# Altium PCB QMKMouse.PcbDoc (part 1 of 2)
Units mm, origin at the board's own origin, x right, y up, seen from the top; angles counter-clockwise.
Board outline 104.61 x 65.75 mm, 4 copper layers (Top Layer, Plane 1, Plane 2, Bottom Layer), stack 0.78 mm thick; 110 components, 56 nets, 360 pads, 326 vias.
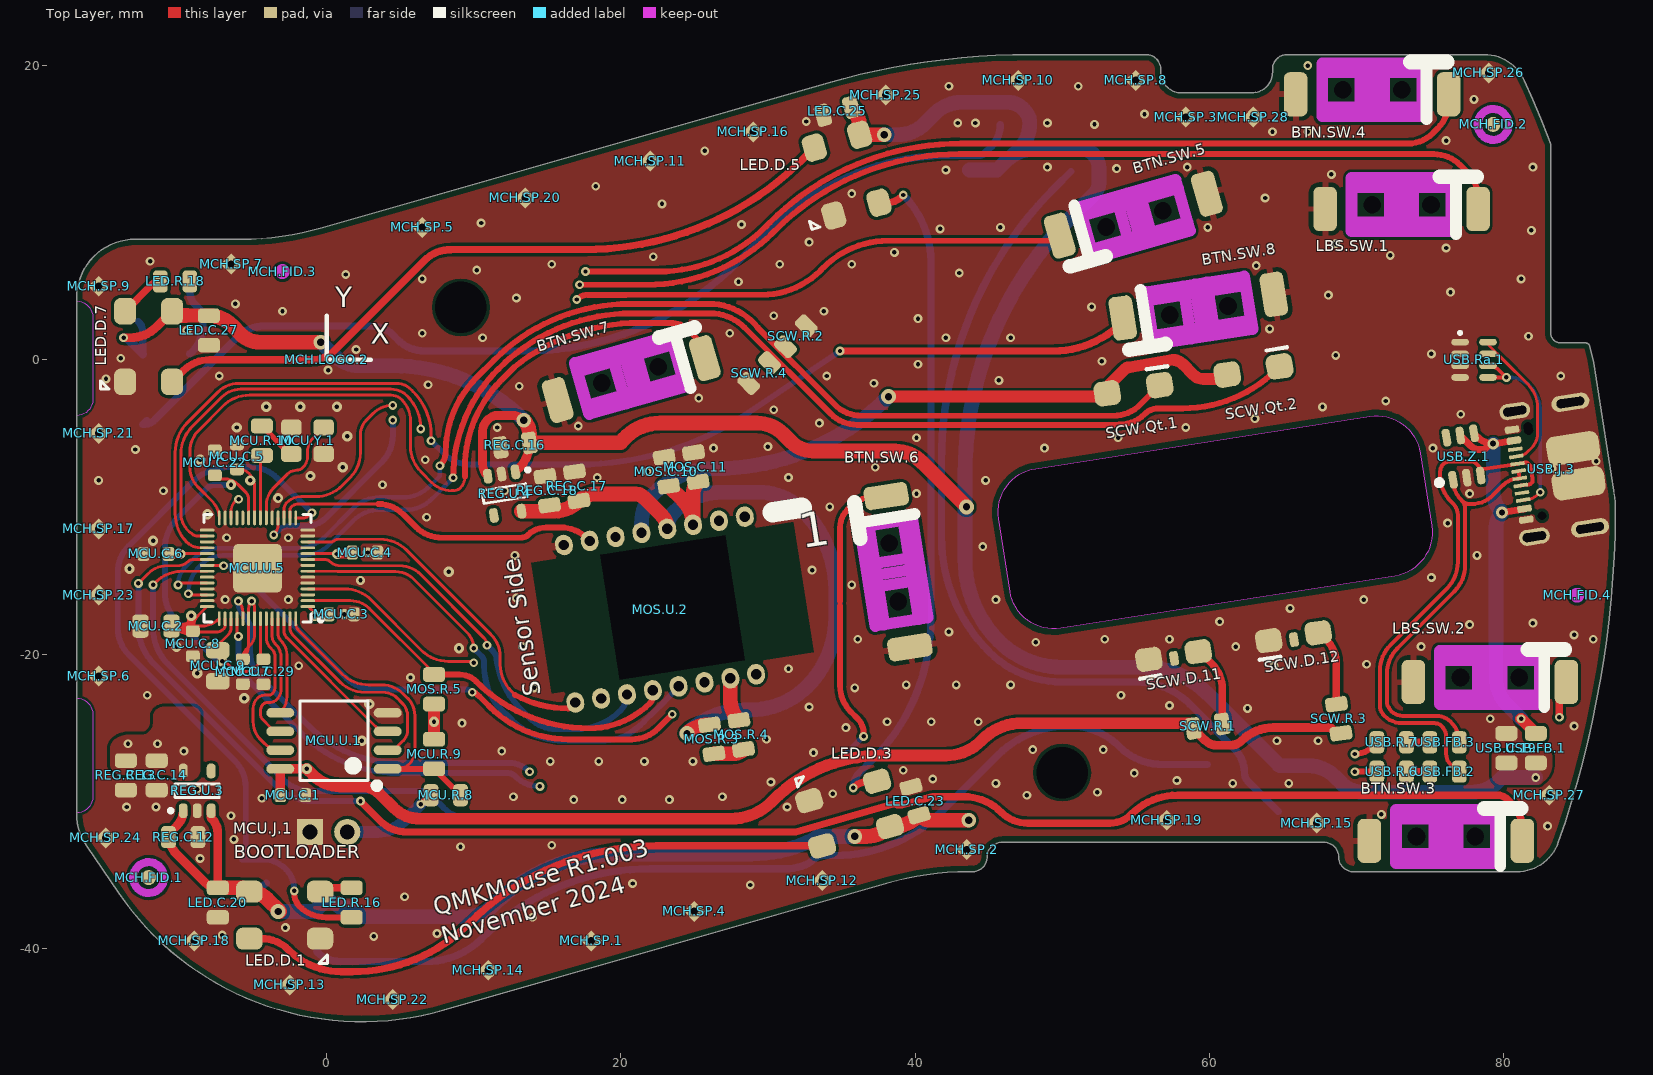
[diagram p0: Top Layer view]
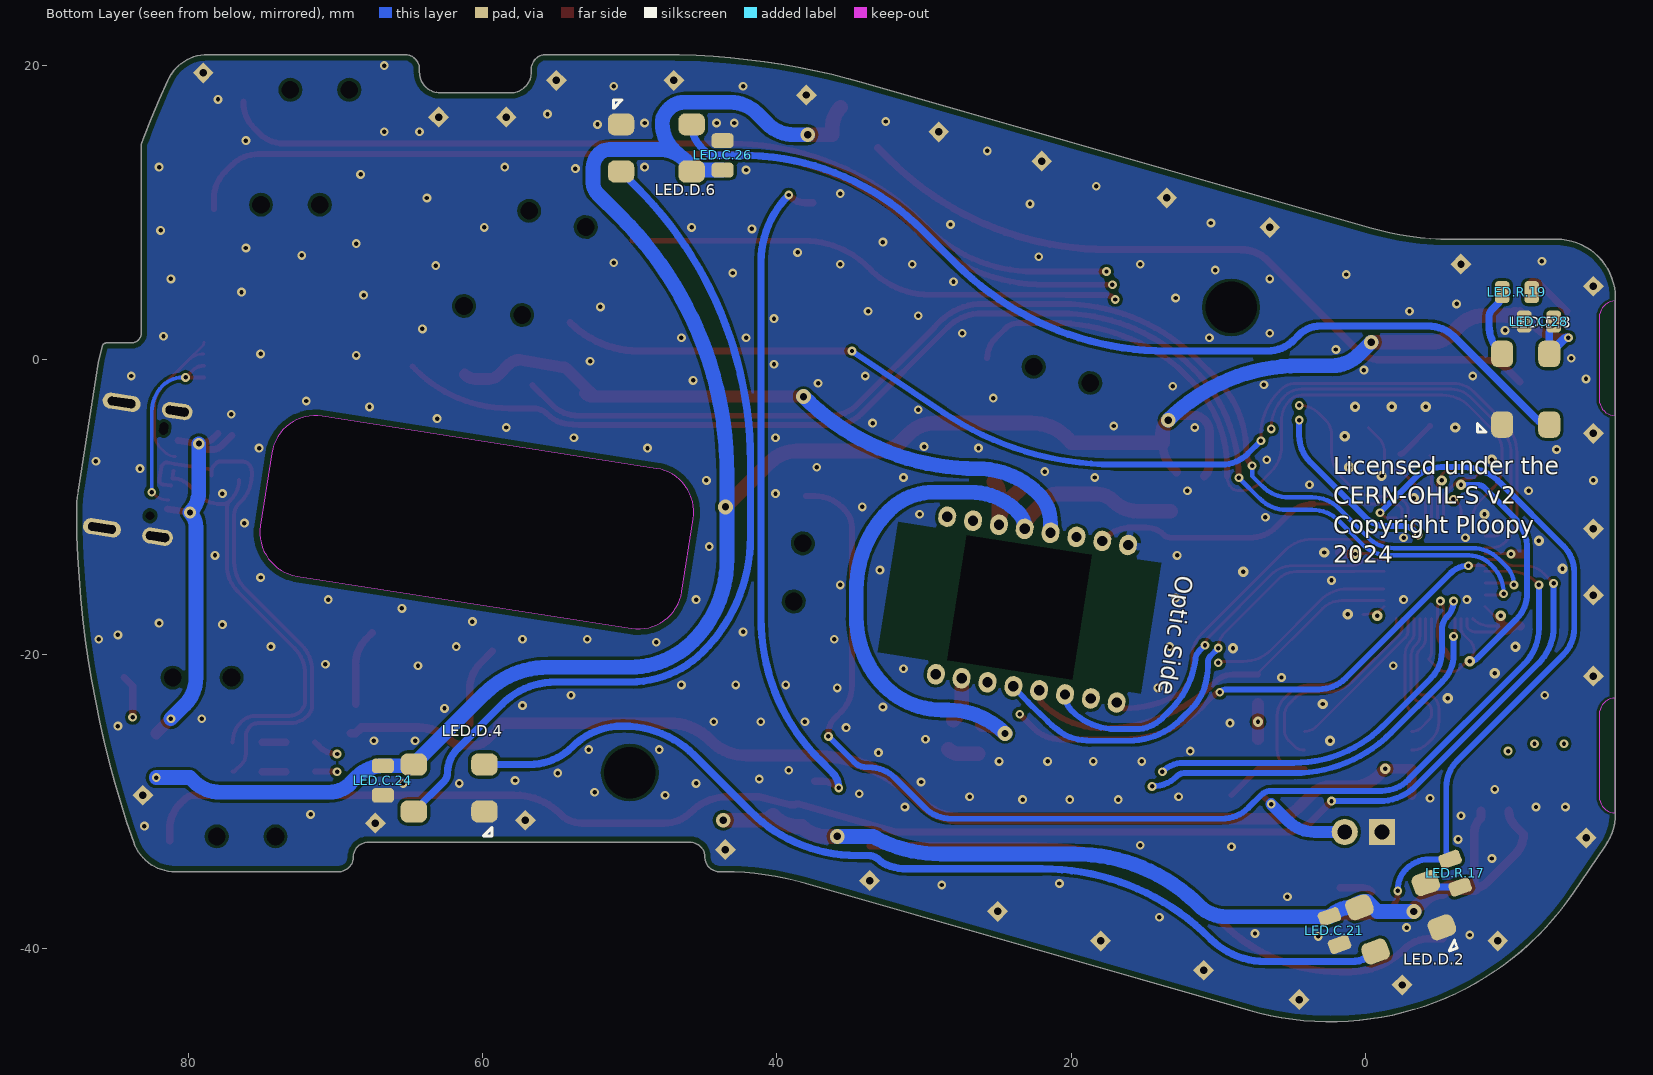
[diagram p1: Bottom Layer view, seen from below]
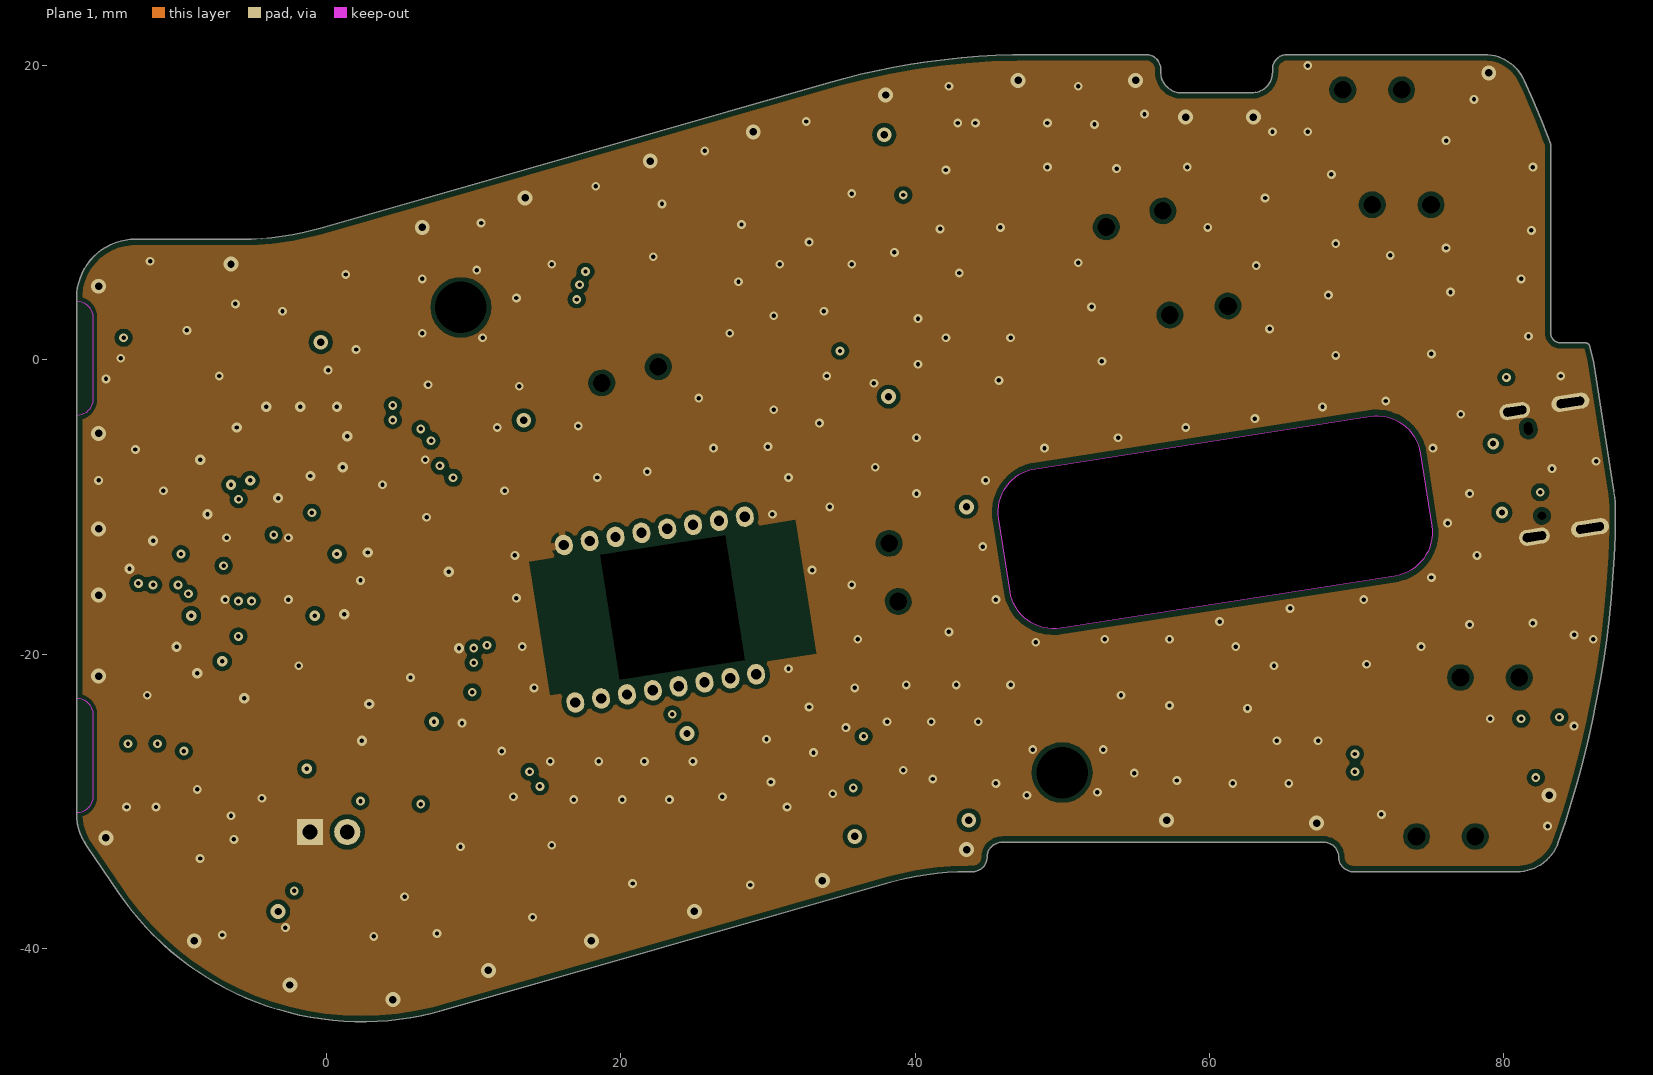
[diagram p2: Plane 1]
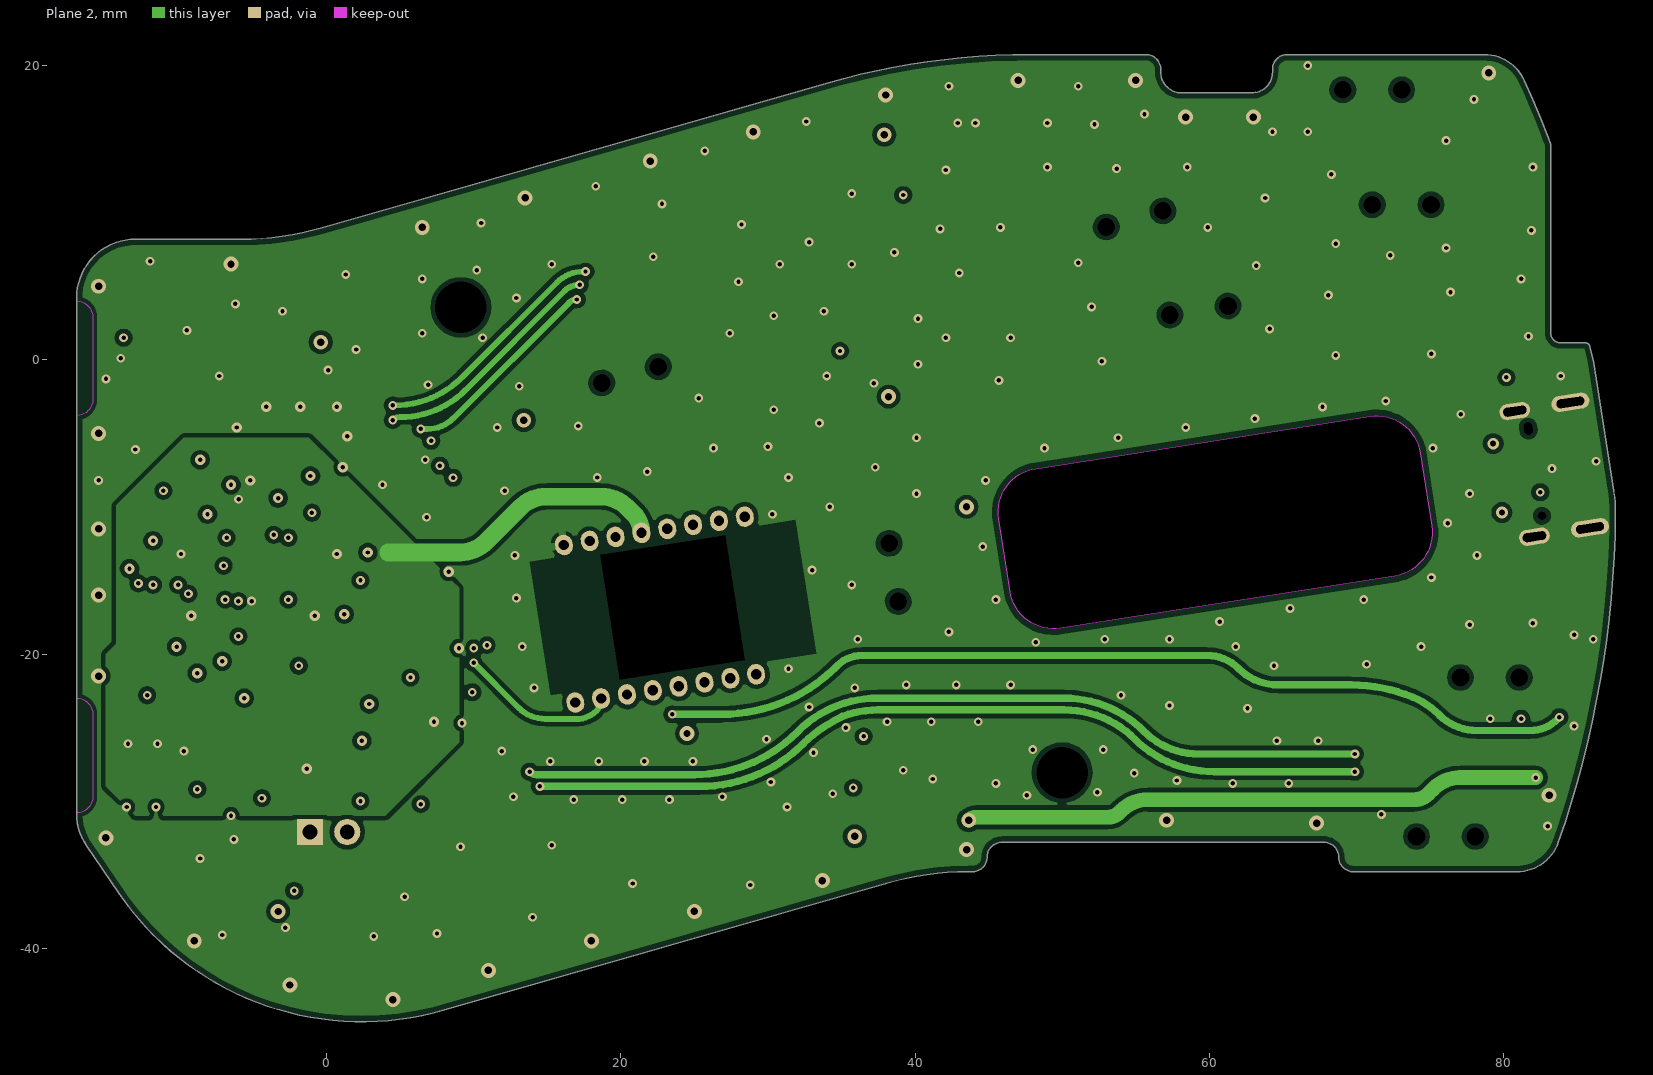
[diagram p3: Plane 2]

## Layer stack, top to bottom
Top Mask: solder mask 0.01, Solder Resist, Dk 3.5
Top Layer: signal copper 0.0356
Dielectric 1: prepreg 0.127, FR-4, Dk 4.2
Plane 1: signal copper 0.036
Dielectric 4: core 0.383, Dk 4.2
Plane 2: signal copper 0.036
Dielectric 2: prepreg 0.127, Dk 4.2
Bottom Layer: signal copper 0.0356
Bottom Solder: solder mask 0.01, Solder Resist, Dk 3.5

## Board outline
-14.13,-36.252 ccw(c2.405,-25) 7.917,-44.226 38.076,-35.578 cw(c43.589,-54.803) 43.589,-34.803 43.9,-34.8 ccw(c43.9,-33.8) 44.9,-33.8 cw(c45.9,-33.8) 45.9,-32.8 67.8,-32.8 cw(c67.8,-33.8) 68.8,-33.8 ccw(c69.8,-33.8) 69.8,-34.8 80.902,-34.803 ccw(c80.902,-31.803) 83.735,-32.788 ccw(c17.617,-9.803) 87.613,-10.544 ccw(c77.613,-10.438) 87.493,-8.893 86.132,-0.19 86.047,0.208 85.871,0.902 ccw(c85.575,0.85) 85.575,1.15 83.9,1.15 cw(c83.9,1.85) 83.2,1.851 83.2,14.65 83.032,15.112 ccw(c17.617,-9.803) 81.424,18.984 ccw(c78.689,17.75) 78.689,20.75 65.301,20.75 ccw(c65.301,19.75) 64.301,19.75 64.301,19.55 cw(c62.901,19.55) 62.901,18.15 58.101,18.15 cw(c58.101,19.55) 56.701,19.55 56.701,19.75 ccw(c55.701,19.75) 55.701,20.75 47.805,20.75 ccw(c47.805,-29.25) 34.023,18.813 -0.298,8.972 cw(c-5.811,28.197) -5.811,8.197 -13,8.197 ccw(c-13,4.197) -17,4.197 -17,-30.803 ccw(c-13,-30.803) -16.307,-33.053
cut-out: 46.461,-15.758 45.689,-10.818 cw(c48.653,-10.355) 48.189,-7.391 70.913,-3.838 cw(c71.377,-6.802) 74.341,-6.338 75.113,-11.278 cw(c72.149,-11.741) 72.612,-14.705 49.889,-18.259 cw(c49.425,-15.295)

## Design rules (kind name [scope] priority, off if disabled: settings)
BoardOutlineClearance [(Not HasFootprint('SPARKGAP'))] p1: gap=0.4 ignorepadtopadclearanceinfootprint=FALSE
Clearance "HighV Pads" [(InNetClass('HighV') AND (IsPad OR IsVia)) vs IsPad OR IsVia] p1: gap=0.4 ignorepadtopadclearanceinfootprint=FALSE except(0: Arc-Hole Track-Hole SMDPad-Hole THPad-Hole Via-Hole Fill-Hole Poly-Hole Region-Hole Text-Hole) // Establishes minimum clearance between bare pads that are high voltage, per IPC2221A Table 6-1, 51-100V, condition A6
Clearance Inter-Pad [IsPad vs IsPad] p2: gap=0.2 ignorepadtopadclearanceinfootprint=FALSE except(0: Arc-Hole Track-Hole SMDPad-Hole THPad-Hole Via-Hole Fill-Hole Poly-Hole Region-Hole Text-Hole)
Clearance "Spark Gaps" [InNetClass('Spark Gap') vs InNet('GND') And InPoly] p3: gap=0.635 ignorepadtopadclearanceinfootprint=FALSE except(0: Arc-Hole Track-Hole SMDPad-Hole THPad-Hole Via-Hole Fill-Hole Poly-Hole Region-Hole Text-Hole)
Clearance FIDs [Name like 'FID*'] p4: gap=1.016 ignorepadtopadclearanceinfootprint=FALSE except(0: Arc-Hole Track-Hole SMDPad-Hole THPad-Hole Via-Hole Fill-Hole Poly-Hole Region-Hole Text-Hole)
Clearance "Inner Planes" [InPoly AND OnMid] p5: gap=0.3 ignorepadtopadclearanceinfootprint=FALSE except(0: Arc-Hole Track-Hole SMDPad-Hole THPad-Hole Via-Hole Fill-Hole Poly-Hole Region-Hole Text-Hole) // Defines a larger clearance for planes on inner layers.
Clearance "All Planes" [InPoly] p6: gap=0.2 ignorepadtopadclearanceinfootprint=FALSE except(0: Arc-Hole Track-Hole SMDPad-Hole THPad-Hole Via-Hole Fill-Hole Poly-Hole Region-Hole Text-Hole) // Defines minimum clearance between planes on the same layer.
Clearance "Inner Layer Clearance" [OnMid vs OnMid] p7: gap=0.3 ignorepadtopadclearanceinfootprint=FALSE except(0: Arc-Hole Track-Hole SMDPad-Hole THPad-Hole Via-Hole Fill-Hole Poly-Hole Region-Hole Text-Hole) // We will give inner layers more spacing because they tend to be subject to stricter process limits.
Clearance [All] p8: gap=0.2 ignorepadtopadclearanceinfootprint=FALSE except(0: Arc-Hole Track-Hole SMDPad-Hole THPad-Hole Via-Hole Fill-Hole Poly-Hole Region-Hole Text-Hole) // 2 oz (70um) boards require at least 10mil spacing. We give a bit more to make sure things work well.
ComponentClearance "Terminal Block" [(HasFootprint('Phoenix 1933189 - Header')) vs (HasFootprint('Phoenix 1933189 - Header'))] p1: gap=-2.286 collisioncheckmode=3 verticalgap=0.254 showdistances=FALSE
ComponentClearance "FET/TP self Clearance" [(Name like 'Q*') Or (Name like 'TP*') vs (Name like 'Q*') Or (Name like 'TP*')] p2: gap=0.254 collisioncheckmode=3 verticalgap=0.254 showdistances=FALSE
ComponentClearance [Not ((Name like 'H*') Or (Name like 'FID*') Or (Name like 'SP*')) vs Not ((Name like 'H*') Or (Name like 'FID*') Or (Name like 'SP*'))] p3: gap=0.5 collisioncheckmode=3 verticalgap=0.5 showdistances=FALSE
DiffPairsRouting [All] p1: maxlimit=0.508 minlimit=0.279 mostfreqgap=0.381 toplayer_prefgap=0.279 toplayer_minwidth=0.279 toplayer_maxwidth=0.508 toplayer_prefwidth=0.381 midlayer2_mingap=0.305 midlayer2_minwidth=0.305 midlayer2_maxwidth=0.508 midlayer2_prefwidth=0.381 midlayer3_prefgap=0.279 midlayer3_minwidth=0.279 midlayer3_maxwidth=0.508 midlayer3_prefwidth=0.381 bottomlayer_prefgap=0.279 bottomlayer_minwidth=0.279 bottomlayer_maxwidth=0.508 bottomlayer_prefwidth=0.381 maxuncoupledlength=12.7
Height [All] p1: minheight=0 maxheight=41 prefheight=12.7
HoleSize [All] p1: absolutevalues=TRUE maxlimit=100 minlimit=0.3 maxpercent=80.000 minpercent=20.000
HoleToHoleClearance [All] p1: gap=0.6 allowstackedmicrovias=TRUE
LayerPairs [All] p1: enforce=FALSE
MinimumSolderMaskSliver [All] p1: minsoldermaskwidth=0.09
NetAntennae [Not (HasFootprint('BALANCE_RESISTOR'))] p1: netantennaetolerance=0
PasteMaskExpansion [All] p1: expansion=-0.025
PlaneClearance [All] p1: clearance=0.3
PlaneConnect [All] p1: pad.planeconnectstyle=Relief pad.reliefexpansion=0.5 pad.reliefentries=4 pad.reliefconductorwidth=0.5 pad.reliefairgap=0.25 via.planeconnectstyle=Direct via.reliefexpansion=0.5 via.reliefentries=4 via.reliefconductorwidth=0.5 via.reliefairgap=0.25
PolygonConnect "PolygonConnect Spark Gap" [HasFootprint('SparkGap')] p1: connectstyle=Direct reliefconductorwidth=0.254 reliefentries=4 polygonreliefangle="90 Angle" airgapwidth=0.254 // This rule makes it so spark gaps get direct connections to ground planes.
PolygonConnect PolygonConnect_GND [All vs InNet('GND')] p2: connectstyle=Direct reliefconductorwidth=0.5 reliefentries=4 polygonreliefangle="90 Angle" airgapwidth=0.25 // This rule specifies all vias and holes connected to a GND plane have direct connections.
PolygonConnect [All] p3: connectstyle=Direct reliefconductorwidth=0.5 reliefentries=4 polygonreliefangle="90 Angle" airgapwidth=0.25
RoutingVias [All] p1: holewidth=0.5 width=1 viastyle="Through Hole" minholewidth=0.2 minwidth=0.5 maxholewidth=5.08 maxwidth=6.35
ShortCircuit [Not (InPadClass('TraceResistorPads')) vs Not (InPadClass('TraceResistorPads'))] p1: allowed=FALSE
SilkToBoardRegionClearance [All] p1 off:
SilkToSilkClearance [All] p1 off: silktosilkclearance=0.254
SilkToSolderMaskClearance SilkscreenOverComponentPads [IsPad] p1: minsilkscreentomaskgap=0.102 clearancetoexposedcopper=FALSE
SolderMaskExpansion "Tent Vias" [IsVia] p1: expansion=0.076 istentingtop=TRUE
SolderMaskExpansion [All] p2: expansion=0.076 istentingtop=FALSE
Width [All] p1: maxlimit=50.8 minlimit=0.2 preferedwidth=0.4 midlayer2_minwidth=0.35 midlayer3_minwidth=0.35 bottomlayer_minwidth=0.26 minimp=50.000000 maximp=50.000000 favimp=50.000000
15 further rules are at their usual default settings.

## Classes and differential pairs
component class SCW: SCW.D.11 SCW.D.12 SCW.Qt.1 SCW.Qt.2 SCW.R.1 SCW.R.2 SCW.R.3 SCW.R.4
component class LED: LED.C.20 LED.C.21 LED.C.23 LED.C.24 LED.C.25 LED.C.26 LED.C.27 LED.C.28 LED.D.1 LED.D.2 LED.D.3 LED.D.4 LED.D.5 LED.D.6 LED.D.7 LED.D.8 LED.R.16 LED.R.17 LED.R.18 LED.R.19
component class BTN: BTN.SW.3 BTN.SW.4 BTN.SW.5 BTN.SW.6 BTN.SW.7 BTN.SW.8 LBS.SW.1 LBS.SW.2
component class USB: USB.C.19 USB.FB.1 USB.FB.2 USB.FB.3 USB.J.3 USB.R.6 USB.R.7 USB.Ra.1 USB.Z.1
component class REG: REG.C.12 REG.C.13 REG.C.14 REG.C.16 REG.C.17 REG.C.18 REG.U.3 REG.U.4
component class MOS: MOS.C.10 MOS.C.11 MOS.R.3 MOS.R.4 MOS.R.5 MOS.U.2
component class MCU: MCU.C.1 MCU.C.2 MCU.C.3 MCU.C.4 MCU.C.5 MCU.C.6 MCU.C.7 MCU.C.8 MCU.C.9 MCU.C.22 MCU.C.29 MCU.J.1 MCU.R.8 MCU.R.9 MCU.R.10 MCU.U.1 MCU.U.5 MCU.Y.1
component class MCH: MCH.FID.1 MCH.FID.2 MCH.FID.3 MCH.FID.4 MCH.LOGO.2 MCH.SP.1 MCH.SP.2 MCH.SP.3 MCH.SP.4 MCH.SP.5 MCH.SP.6 MCH.SP.7 MCH.SP.8 MCH.SP.9 MCH.SP.10 MCH.SP.11 MCH.SP.12 MCH.SP.13 MCH.SP.14 MCH.SP.15 MCH.SP.16 MCH.SP.17 MCH.SP.18 MCH.SP.19 MCH.SP.20 MCH.SP.21 MCH.SP.22 MCH.SP.23 MCH.SP.24 MCH.SP.25 MCH.SP.26 MCH.SP.27 MCH.SP.28

## Components (designator, comment, footprint, x,y, rotation, side; value= is the part's Value field where it differs from the comment)
BTN.SW.3 "D2LS-21" D2LS-21 76.089,-32.403 r180 top locked (schematic designator SW3)
BTN.SW.4 "D2LS-21" D2LS-21 71.075,18.35 r180 top (schematic designator SW4)
BTN.SW.5 "D2LS-21" D2LS-21 54.925,9.575 r15.89 top locked (schematic designator SW5)
BTN.SW.6 "D2LS-21" D2LS-21 38.55,-14.45 r278.89 top locked (schematic designator SW6)
BTN.SW.7 "D2LS-21" D2LS-21 20.625,-1.025 r195.89 top locked (schematic designator SW7)
BTN.SW.8 "D2LS-21" D2LS-21 59.3,3.35 r8.89 top locked (schematic designator SW8)
LBS.SW.1 "D2LS-21" D2LS-21 73.075,10.55 r180 top locked (schematic designator SW1)
LBS.SW.2 "D2LS-21" D2LS-21 79.075,-21.6 r180 top locked (schematic designator SW2)
LED.C.20 "0805" 0805 -7.4,-36.9 r180 top value="0.1uF 100V" (schematic designator C20)
LED.C.21 "0805" 0805 2.1,-38.8 r340 bottom value="0.1uF 100V" (schematic designator C21)
LED.C.23 "0805" 0805 40,-30 r15.89 top value="0.1uF 100V" (schematic designator C23)
LED.C.24 "0805" 0805 66.785,-28.608 r0 bottom value="0.1uF 100V" (schematic designator C24)
LED.C.25 "0805" 0805 34.7,16.9 r105.89 top value="0.1uF 100V" (schematic designator C25)
LED.C.26 "0805" 0805 43.7,13.9 r180 bottom value="0.1uF 100V" (schematic designator C26)
LED.C.27 "0805" 0805 -8,2 r180 top value="0.1uF 100V" (schematic designator C27)
LED.C.28 "0805" 0805 -11.8,2.6 r90 bottom value="0.1uF 100V" (schematic designator C28)
LED.D.1 "IN-PI55TATPRPGPB" IN-PI55TATPRPGPB -2.85,-37.75 r0 top (schematic designator D1)
LED.D.2 "IN-PI55TATPRPGPB" IN-PI55TATPRPGPB -2.4,-37.9 r160 bottom (schematic designator D2)
LED.D.3 "IN-PI55TATPRPGPB" IN-PI55TATPRPGPB 35.55,-30.85 r195.89 top (schematic designator D3)
LED.D.4 "IN-PI55TATPRPGPB" IN-PI55TATPRPGPB 62.285,-29.108 r180 bottom (schematic designator D4)
LED.D.5 "IN-PI55TATPRPGPB" IN-PI55TATPRPGPB 35.35,12.55 r285.89 top (schematic designator D5)
LED.D.6 "IN-PI55TATPRPGPB" IN-PI55TATPRPGPB 48.2,14.4 r0 bottom (schematic designator D6)
LED.D.7 "IN-PI55TATPRPGPB" IN-PI55TATPRPGPB -12.1,0.9 r270 top (schematic designator D7)
LED.D.8 "IN-PI55TATPRPGPB" IN-PI55TATPRPGPB -10.9,-2 r270 bottom (schematic designator D8)
LED.R.16 "0805" 0805 1.7,-36.9 r0 top value="1k 1%" (schematic designator R16)
LED.R.17 "0805" 0805 -6.1,-34.9 r340 bottom value="1k 1%" (schematic designator R17)
LED.R.18 "0805" 0805 -10.3,5.325 r270 top value="1k 1%" (schematic designator R18)
LED.R.19 "0805" 0805 -10.3,4.6 r270 bottom value="1k 1%" (schematic designator R19)
MCH.FID.1 "IPC-7351 Fiducial 1mm" FIDUCIAL_1.5 -12.1,-35.2 r90 top (schematic designator FID1)
MCH.FID.2 "IPC-7351 Fiducial 1mm" FIDUCIAL_1.5 79.3,16 r90 top (schematic designator FID2)
MCH.FID.3 "1mm Fiducial for OpenPNP" FIDUCIAL-NEW -3,6 r90 top (schematic designator FID3)
MCH.FID.4 "1mm Fiducial for OpenPNP" FIDUCIAL-NEW 85,-16 r90 top (schematic designator FID4)
MCH.LOGO.2 "Coordinate system marker for assembly" "Coordinate System" 0,0 r0 top (schematic designator LOGO2)
MCH.SP.1 "Spark Gap" SparkGap 18,-39.5 r90 top (schematic designator SP1)
MCH.SP.2 "Spark Gap" SparkGap 43.5,-33.3 r90 top (schematic designator SP2)
MCH.SP.3 "Spark Gap" SparkGap 58.4,16.5 r90 top (schematic designator SP3)
MCH.SP.4 "Spark Gap" SparkGap 25,-37.5 r90 top (schematic designator SP4)
MCH.SP.5 "Spark Gap" SparkGap 6.5,9 r90 top (schematic designator SP5)
MCH.SP.6 "Spark Gap" SparkGap -15.5,-21.5 r90 top (schematic designator SP6)
MCH.SP.7 "Spark Gap" SparkGap -6.5,6.5 r90 top (schematic designator SP7)
MCH.SP.8 "Spark Gap" SparkGap 55,19 r90 top (schematic designator SP8)
MCH.SP.9 "Spark Gap" SparkGap -15.5,5 r90 top (schematic designator SP9)
MCH.SP.10 "Spark Gap" SparkGap 47,19 r90 top (schematic designator SP10)
MCH.SP.11 "Spark Gap" SparkGap 22,13.5 r90 top (schematic designator SP11)
MCH.SP.12 "Spark Gap" SparkGap 33.7,-35.4 r90 top (schematic designator SP12)
MCH.SP.13 "Spark Gap" SparkGap -2.5,-42.5 r90 top (schematic designator SP13)
MCH.SP.14 "Spark Gap" SparkGap 11,-41.5 r90 top (schematic designator SP14)
MCH.SP.15 "Spark Gap" SparkGap 67.3,-31.5 r90 top (schematic designator SP15)
MCH.SP.16 "Spark Gap" SparkGap 29,15.5 r90 top (schematic designator SP16)
MCH.SP.17 "Spark Gap" SparkGap -15.5,-11.5 r90 top (schematic designator SP17)
MCH.SP.18 "Spark Gap" SparkGap -9,-39.5 r90 top (schematic designator SP18)
MCH.SP.19 "Spark Gap" SparkGap 57.1,-31.3 r90 top (schematic designator SP19)
MCH.SP.20 "Spark Gap" SparkGap 13.5,11 r90 top (schematic designator SP20)
MCH.SP.21 "Spark Gap" SparkGap -15.5,-5 r90 top (schematic designator SP21)
MCH.SP.22 "Spark Gap" SparkGap 4.5,-43.5 r90 top (schematic designator SP22)
MCH.SP.23 "Spark Gap" SparkGap -15.5,-16 r90 top (schematic designator SP23)
MCH.SP.24 "Spark Gap" SparkGap -15,-32.5 r90 top (schematic designator SP24)
MCH.SP.25 "Spark Gap" SparkGap 38,18 r90 top (schematic designator SP25)
MCH.SP.26 "Spark Gap" SparkGap 79,19.5 r90 top (schematic designator SP26)
MCH.SP.27 "Spark Gap" SparkGap 83.1,-29.6 r90 top (schematic designator SP27)
MCH.SP.28 "Spark Gap" SparkGap 63,16.5 r90 top (schematic designator SP28)
MCU.C.1 "0603 X5R" "0603 capacitor - CAPC1608X06N" -2.3,-29.6 r90 top value="0.1uF 25V" (schematic designator C1)
MCU.C.2 "0805 X5R" "0805 - TALL" -11.6,-18.1 r90 top value="1uF 25V" (schematic designator C2)
MCU.C.3 "0603 X5R" "0603 capacitor - CAPC1608X06N" 1,-17.3 r90 top value="0.1uF 25V" (schematic designator C3)
MCU.C.4 "0603 X5R" "0603 capacitor - CAPC1608X06N" 2.6,-13.1 r90 top value="0.1uF 25V" (schematic designator C4)
MCU.C.5 "0603 X5R" "0603 capacitor - CAPC1608X06N" -6.1,-6.6 r180 top value="0.1uF 25V" (schematic designator C5)
MCU.C.6 "0603 X5R" "0603 capacitor - CAPC1608X06N" -11.6,-13.2 r270 top value="0.1uF 25V" (schematic designator C6)
MCU.C.7 "0603 X5R" "0603 capacitor - CAPC1608X06N" -5.7,-21.2 r0 top value="0.1uF 25V" (schematic designator C7)
MCU.C.8 "0603 X5R" "0603 capacitor - CAPC1608X06N" -9.1,-19.3 r0 top value="0.1uF 25V" (schematic designator C8)
MCU.C.9 "0805 X5R" "0805 - TALL" -7.4,-20.8 r180 top value="1uF 25V" (schematic designator C9)
MCU.C.22 "0603 X5R" "0603 capacitor - CAPC1608X06N" -7.6,-7 r180 top value="0.1uF 25V" (schematic designator C22)
MCU.C.29 "0603 X5R" "0603 capacitor - CAPC1608X06N" -4.3,-21.2 r0 top value="0.1uF 25V" (schematic designator C29)
MCU.J.1 "HEADER2" 2x1 -1.14,-32.1 r90 top (schematic designator J1)
MCU.R.8 "0805" 0805 8.1,-29.6 r90 top value="1k 1%" (schematic designator R8)
MCU.R.9 "0805" 0805 7.3,-26.8 r0 top value="10k 1%" (schematic designator R9)
MCU.R.10 "0805" 0805 -4.4,-5.5 r180 top value="1k 1%" (schematic designator R10)
MCU.U.1 "W25Q16JVSSIQ" "W25Q128JVS - SOIC127P790X216-8M" 0.5,-25.9 r180 top (schematic designator U1)
MCU.U.5 "RP2040" "RP2040 - QFN40P700X700X90_HS-57M" -4.7,-14.175 r180 top (schematic designator U5)
MCU.Y.1 "RH100-12.000-16-3030" RH100-12.000-16-3030 -1.3,-5.5 r180 top (schematic designator Y1)
MOS.C.10 "0805" 0805 23.1,-7.6 r8.89 top value="10uF 25V" (schematic designator C10)
MOS.C.11 "0805" 0805 25.1,-7.3 r8.89 top value="0.1uF 100V" (schematic designator C11)
MOS.R.3 "0805" 0805 26.177,-25.794 r188.89 top value="22R 1%" (schematic designator R3)
MOS.R.4 "0805" 0805 28.177,-25.494 r8.89 top value="22R 1%" (schematic designator R4)
MOS.R.5 "0805" 0805 7.3,-22.4 r0 top value="10k 1%" (schematic designator R5)
MOS.U.2 "PMW3360DM-T2QU" PMW3360DM-T2QU 28.425,-10.666 r8.89 top locked (schematic designator U2)
REG.C.12 "0805" 0805 -9.75,-32.45 r270 top value="1uF 25V" (schematic designator C12)
REG.C.13 "0805" 0805 -13.65,-28.25 r180 top value="10uF 25V" (schematic designator C13)
REG.C.14 "0805" 0805 -11.55,-28.25 r180 top value="1uF 25V" (schematic designator C14)
REG.C.16 "0805" 0805 12.8,-5.8 r98.89 top value="1uF 25V" (schematic designator C16)
REG.C.17 "0805" 0805 17,-8.6 r8.89 top value="10uF 25V" (schematic designator C17)
REG.C.18 "0805" 0805 15,-8.9 r8.89 top value="1uF 25V" (schematic designator C18)
REG.U.3 "AP2202K-3.3" "AP2202 - SOT95P270X145-5N" -8.8,-29.3 r90 top (schematic designator U3)
REG.U.4 "AP2204K-1.8" "AP2202 - SOT95P270X145-5N" 12.1,-9.1 r278.89 top (schematic designator U4)
SCW.D.11 "IR12-21C/TR8 or VSMB10940" IR12-21C/TR8 57.575,-20.1 r278.89 top (schematic designator D11)
SCW.D.12 "IR12-21C/TR8 or VSMB10940" IR12-21C/TR8 65.725,-18.825 r278.89 top (schematic designator D12)
SCW.Qt.1 "PT26-51B/TR8 or PT12-21B/TR8" PT26-51B/TR8 54.85,-2 r98.89 top (schematic designator Qt1)
SCW.Qt.2 "PT26-51B/TR8 or PT12-21B/TR8" PT26-51B/TR8 63,-0.725 r98.89 top (schematic designator Qt2)
SCW.R.1 "0805" 0805 59.9,-24.9 r278.89 top value="100R 1%" (schematic designator R1)
SCW.R.2 "0805" 0805 31.9,1.6 r315 top value="1k 1%" (schematic designator R2)
SCW.R.3 "0805" 0805 68.8,-24.4 r8.89 top value="100R 1%" (schematic designator R3)
SCW.R.4 "0805" 0805 29.4,-0.9 r135 top value="1k 1%" (schematic designator R4)
USB.C.19 "0805" 0805 80.2,-26.4 r0 top value="10uF 25V" (schematic designator C19)
USB.FB.1 "ACML-0805-601-T" 0805 82.2,-26.4 r0 top (schematic designator FB1)
USB.FB.2 "ACML-0805-601-T" 0805 76,-28 r270 top (schematic designator FB2)
USB.FB.3 "ACML-0805-601-T" 0805 76,-26 r270 top (schematic designator FB3)
USB.J.3 "DX07S016JA1R1500" DX07S016JA1R1500 84.032,-7.347 r98.89 top locked (schematic designator J3)
USB.R.6 "0805" 0805 72.4,-28 r270 top value="22R 1%" (schematic designator R6)
USB.R.7 "0805" 0805 72.4,-26 r270 top value="22R 1%" (schematic designator R7)
USB.Ra.1 "1206 Quad" "4x 10k 1% - CAC-80P320X160-8M" 78,0 r0 top value="10k 1%" (schematic designator Ra1)
USB.Z.1 "IP4220CZ6,125" "PESD3V3S4UD - SOT95P275X110-6N" 77.285,-6.579 r98.89 top (schematic designator Z1)

## Footprints (in the part's own frame and the unit in brackets; to place one, negate y for a bottom-side part, rotate by r counter-clockwise, add the part's x,y. Pads: shape width x height; smd on the part's side, far side on the other; paste and mask are expansions set on the pad)
2x1 [mil]
  rect 70x70 hole 40 paste-3897.64: 1(0,0)
  round 70 hole 40 paste-3897.64: 2(0,-100)
  body extent -50,-150 50,50, height 339
"4x 10k 1% - CAC-80P320X160-8M" [mm] "Chip Array, Concave, 8-Leads, Pitch 0.80mm,  Body 3.20x1.60mm,  IPC Low Density"
  oval 1.2x0.45 smd paste-99: 1(-0.95,1.2) 2(-0.95,0.4) 3(-0.95,-0.4) 4(-0.95,-1.2) 5(0.95,-1.2) 6(0.95,-0.4) 7(0.95,0.4) 8(0.95,1.2)
  silkscreen extent -1,1.78 -0.9,1.87, body extent -0.9,-1.7 0.9,1.7, height 0.6
"0603 capacitor - CAPC1608X06N" [mm] "Chip Capacitor, 2-Leads, Body 1.60x0.80mm, IPC Medium Density"
  rrect50% 0.95x0.8 smd: 1(0,-0.85) 2(0,0.85)
  body extent -0.45,-0.85 0.45,0.85, height 0.6
0805 [mm] "Chip Capacitor, 2-Leads, Body 2.0x1.3mm, IPC Medium Density"
  rrect50% 1.5x1 smd paste+0: 1(0,1.002) 2(0,-1.002)
  body extent -0.72,-1.1 0.72,1.1, height 0.8
"0805 - TALL" [mm] "Same as 0805 footprint, but solder mask is adjusted to leave more paste behind for tall (>0.9mm) components like big caps, which tend to be solder-starved on the regular footprint."
  rrect50% 1.6x1.1 smd paste+0: 1(0,1.052) 2(0,-1.052)
  body extent -0.72,-1.1 0.72,1.1, height 0.8
"AP2202 - SOT95P270X145-5N" [mm] "SOT23, 5-Leads, Body 2.92x2.70mm, Pitch 0.95mm, IPC Medium Density"
  rrect80% 1x0.6 smd paste-0.04: 1(-1.35,0.95) 2(-1.35,0) 3(-1.35,-0.95) 4(1.35,-0.95) 5(1.35,0.95)
  silkscreen extent -1.47,-1.5 0.45,1.92, body extent -0.85,-1.52 0.85,1.52, height 1.45
"Coordinate System" [mm]
  silkscreen extent 0,0 3,3
D2LS-21 [mm]
  rrect50% 1.6x3 smd paste-0.04: A(-5.2,0.3) B(5.2,0.3)
  round 0 hole 1.2 unplated: ""(-2,0) ""(2,0)
  Top Layer keep-out lines w0.8: 3.4,1.2 -3.4,1.2 ; 3.4,-1.2 -3.4,-1.2 ; 0.8,1.8 0.8,-1.7 ; 0,1.8 0,-1.7 ; -0.8,1.8 -0.8,-1.8 ; 3.4,1.8 -3.4,1.8 -3.4,-1.8 3.4,-1.8 3.4,1.8
  silkscreen extent -5.1,-2 -2.6,2, body extent -5.6,-2.4 5.6,2.4, height 3.19
DX07S016JA1R1500 [mm] "USB-C (USB TYPE-C) USB 2.0 Receptacle Connector 24 (16+8 Dummy) Position Surface Mount, Right Angle; Through Hole"
  rrect70% 0.5x1 smd paste-0.04 mask+0.05: 1(-3.1,3) 2(-2.35,3) 11(2.35,3) 12(3.1,3)
  rrect70% 0.27x1 smd paste-0.02 mask+0.05: 3(-1.75,3) 4(-1.25,3) 5(-0.75,3) 6(-0.25,3) 7(0.25,3) 8(0.75,3) 9(1.25,3) 10(1.75,3)
  rrect100% 1.1x2.1 hole 0.6 slot 1.6 at 90 deg paste-99 mask+0.1: SHELL(-4.32,2.625) SHELL(4.32,2.625)
  rrect100% 1.1x2.6 hole 0.6 slot 1.9 at 90 deg paste-99 mask+0.1: SHELL(-4.32,-1.2) SHELL(4.32,-1.2)
  rrect60% 2x3.6 smd paste-0.12 mask+0.05: SHELL(-1.2,-0.9) SHELL(1.2,-0.9)
  round 0 hole 0.6: ""(-3,1.9)
  round 0 hole 0.6 slot 0.85 at 180 deg: ""(3,1.9)
  body extent -4.47,-3.65 4.47,3.25, height 3.18
FIDUCIAL-NEW [mm]
  Top Layer keep-out circle w0.6: c0,0 r0.2
FIDUCIAL_1.5 [mil]
  round 40 smd paste-60 mask+30: 1(0,0)
  Top Layer keep-out circle w21.65: c0,0 r41.34
IN-PI55TATPRPGPB [mm]
  rrect60% 1.8x1.5 smd paste-0.04 mask+0.06: 1(-2.4,1.6) 2(-2.4,-1.6) 3(2.4,-1.6) 4(2.4,1.6)
  silkscreen extent 2.32,-3.27 2.9,-2.7, body extent -2.5,-2.5 2.5,2.5, height 1.6
IR12-21C/TR8 [mm]
  rrect60% 1.6x1.8 smd paste-0.03: A(0,1.702) C(0,-1.702)
  rrect70% 1x0.6 smd paste-99: ""(0.2,0.002)
  silkscreen extent 1.2,-2.5 1.2,-1.1, body extent -2.29,-1.5 0.2,1.5, height 1
"PESD3V3S4UD - SOT95P275X110-6N" [mm] "SOT23, 6-Leads, Body 2.90x2.75mm, Pitch 0.95mm, IPC Medium Density"
  rrect80% 1.2x0.55 smd paste-0.03 mask+0.085: 1(-1.45,0.95) 2(-1.45,0) 3(-1.45,-0.95) 4(1.45,-0.95) 5(1.45,0) 6(1.45,0.95)
  silkscreen extent -1.62,1.78 -1.38,2.02, body extent -0.85,-1.55 0.85,1.55, height 1.1
PMW3360DM-T2QU [mm]
  oval 1.2x1.4 hole 0.7: 1(0,0) 2(-1.778,0) 3(-3.556,0) 4(-5.334,0) 5(-7.112,0) 6(-8.89,0) 7(-10.668,0) 8(-12.446,0) 9(-13.335,-10.7) 10(-11.557,-10.7) 11(-9.779,-10.7) 12(-8.001,-10.7) 13(-6.223,-10.7) 14(-4.445,-10.7) 15(-2.667,-10.7) 16(-0.889,-10.7)
  rect 0x0 hole 8.6 square unplated: ""(-5.8,-5.35)
  silkscreen extent 1.93,0 3.9,0, body extent -16.06,-14.76 5.09,4.09, height 2.44
PT26-51B/TR8 [mm]
  rrect60% 1.7x1.8 smd paste-0.03: C(0,1.802) E(0,-1.802)
  silkscreen extent 1.2,-2.5 1.2,-1.1, body extent -2.05,-1.6 0.45,1.6, height 1.6
RH100-12.000-16-3030 [mm] "3.2mm x 2.5mm crystal"
  rrect50% 1.4x1.1 smd paste-0.1: 1(-1.1,-0.9) 2(1.1,-0.9) 3(1.1,0.9) 4(-1.1,0.9)
  body extent -1.6,-1.25 1.6,1.25, height 1
"RP2040 - QFN40P700X700X90_HS-57M" [mm] "QFN, 56-Leads, Body 7.00x7.00mm, Pitch 0.40mm, Thermal Pad 3.10x3.10mm, IPC Low Density"
  oval 1x0.2 smd paste-99 mask+0.05: 1(-3.425,2.6) 2(-3.425,2.2) 3(-3.425,1.8) 4(-3.425,1.4) 5(-3.425,1) 6(-3.425,0.6) 7(-3.425,0.2) 8(-3.425,-0.2) 9(-3.425,-0.6) 10(-3.425,-1) 11(-3.425,-1.4) 12(-3.425,-1.8) 13(-3.425,-2.2) 14(-3.425,-2.6) 29(3.425,-2.6) 30(3.425,-2.2) 31(3.425,-1.8) 32(3.425,-1.4) 33(3.425,-1) 34(3.425,-0.6) 35(3.425,-0.2) 36(3.425,0.2) 37(3.425,0.6) 38(3.425,1) 39(3.425,1.4) 40(3.425,1.8) 41(3.425,2.2) 42(3.425,2.6)
  oval 0.2x1 smd paste-99 mask+0.05: 15(-2.6,-3.425) 16(-2.2,-3.425) 17(-1.8,-3.425) 18(-1.4,-3.425) 19(-1,-3.425) 20(-0.6,-3.425) 21(-0.2,-3.425) 22(0.2,-3.425) 23(0.6,-3.425) 24(1,-3.425) 25(1.4,-3.425) 26(1.8,-3.425) 27(2.2,-3.425) 28(2.6,-3.425) 43(2.6,3.425) 44(2.2,3.425) 45(1.8,3.425) 46(1.4,3.425) 47(1,3.425) 48(0.6,3.425) 49(0.2,3.425) 50(-0.2,3.425) 51(-0.6,3.425) 52(-1,3.425) 53(-1.4,3.425) 54(-1.8,3.425) 55(-2.2,3.425) 56(-2.6,3.425)
  rrect20% 3.3x3.3 smd paste-99: 57(0,0)
  silkscreen extent -4.43,-3.65 3.65,3.65, body extent -3.5,-3.5 3.5,3.5, height 0.9
SparkGap [mil]
  rect 40x40 smd rot 45 paste-99 mask+4: 1(0,0)
  rect 40x40 smd far side rot 45 paste-99 mask+4: 1(0,0)
"W25Q128JVS - SOIC127P790X216-8M" [mm] "SOIC, 8-Leads, Body 5.28x5.28mm, Pitch 1.27mm, IPC Low Density"
  oval 1.9x0.65 smd paste-0.05: 1(-3.65,1.905) 2(-3.65,0.635) 3(-3.65,-0.635) 4(-3.65,-1.905) 5(3.65,-1.905) 6(3.65,-0.635) 7(3.65,0.635) 8(3.65,1.905)
  silkscreen extent -3.05,-2.7 2.3,3.17, body extent -2.7,-2.7 2.7,2.7, height 2.16

## Part data
BTN.SW.3 BTN.SW.4 BTN.SW.5 BTN.SW.6 BTN.SW.7 BTN.SW.8 LBS.SW.1 LBS.SW.2: "Compact Surface-mounting Switch for long durability", Supplier Part Number 1=Z4378CT-ND, Supplier 1=Digi-Key, Supplier 2=Mouser, Supplier Part Number 2=653-D2LS-21
LED.C.20 LED.C.21 LED.C.23 LED.C.24 LED.C.25 LED.C.26 LED.C.27 LED.C.28 MOS.C.11: library part "Cap 0.1uF 100V", "0805, X5R or better", Supplier Part Number 1=1276-6840-2-ND, Supplier 1=Digi-Key
  MOS.C.11: PNP-A=0, PNP-da=0, PNP-dx=0, PNP-dy=0, PNP-FeedType=Tape, PNP-Level=1, PNP-Lv=1, PNP-Nzl=2, PNP-PlacePriority=1, PNP-Pt=0, PNP-TapeIndex=1, PNP-TapeWidth=8, PNP-Thk=1.05, PNP-TS=70, PNP-Type=chi, PNP-Voff=0, PNP-W=0, PNP-X=2.00, PNP-Y=1.25
LED.D.1 LED.D.2 LED.D.3 LED.D.4 LED.D.5 LED.D.6 LED.D.7 LED.D.8: "ADDRESS LED DISCRETE SERIAL RGB", Supplier Part Number 1=1830-1204-1-ND, Supplier 1=Digi-Key, Supplier 2=Arrow, Supplier 3=Mouser, Supplier Part Number 2=IN-PI55TATPRPGPB, Supplier Part Number 3=743-IN-PI55TATPRPGPB
LED.R.16 LED.R.17 LED.R.18 LED.R.19 MCU.R.8 MCU.R.10 SCW.R.2 SCW.R.4: library part "Res 1k 1% 0805", "Chip resistor, 1/8W 100PPM", Supplier Part Number 1=RMCF0805FT1K00TR-ND, Supplier 1=Digi-Key
  SCW.R.2 SCW.R.4: PNP-A=0, PNP-da=0, PNP-dx=0, PNP-dy=0, PNP-FeedType=Tape, PNP-Level=1, PNP-Lv=1, PNP-Nzl=2, PNP-PlacePriority=1, PNP-Pt=0, PNP-TapeIndex=1, PNP-TapeWidth=8, PNP-Thk=0.55, PNP-TS=70, PNP-Type=chi, PNP-Voff=0, PNP-W=0, PNP-X=2.00, PNP-Y=1.25
MCH.FID.1 MCH.FID.2: library part FIDUCIAL_1.5, PNP-A=1, PNP-da=0, PNP-dx=0, PNP-dy=0, PNP-FeedType=Fiducial, PNP-Level=1, PNP-Lv=1, PNP-Nzl=2, PNP-PlacePriority=0, PNP-Pt=0, PNP-TapeIndex=0, PNP-TapeWidth=0, PNP-Thk=1.02, PNP-TS=70, PNP-Type=MARK1, PNP-Voff=0, PNP-W=0, PNP-X=4, PNP-Y=4
MCH.FID.3 MCH.FID.4: library part FIDUCIAL_NEW, "This fiducial is designed to work with OpenPNP. It presents a circular pattern under the solder mask, to prevent glare issues from messing with the detection.", PNP-A=1, PNP-da=0, PNP-dx=0, PNP-dy=0, PNP-FeedType=Fiducial, PNP-Level=1, PNP-Lv=1, PNP-Nzl=2, PNP-PlacePriority=0, PNP-Pt=0, PNP-TapeIndex=0, PNP-TapeWidth=0, PNP-Thk=1.02, PNP-TS=70, PNP-Type=MARK1, PNP-Voff=0, PNP-W=0, PNP-X=4, PNP-Y=4
MCH.LOGO.2: library part CoordinateSystem
MCH.SP.1 MCH.SP.2 MCH.SP.3 MCH.SP.4 MCH.SP.5 MCH.SP.6 MCH.SP.7 MCH.SP.8 MCH.SP.9 MCH.SP.10 MCH.SP.11 MCH.SP.12 MCH.SP.13 MCH.SP.14 MCH.SP.15 MCH.SP.16 MCH.SP.17 MCH.SP.18 MCH.SP.19 MCH.SP.20 MCH.SP.21 MCH.SP.22 MCH.SP.23 MCH.SP.24 MCH.SP.25 MCH.SP.26 MCH.SP.27 MCH.SP.28: "Open square pad for spark gapping", PNP-A=0, PNP-da=0, PNP-dx=0, PNP-dy=0, PNP-FeedType=Tape, PNP-Level=1, PNP-Lv=1, PNP-Nzl=2, PNP-PlacePriority=1, PNP-Pt=0, PNP-TapeIndex=1, PNP-TapeWidth=8, PNP-Thk=1, PNP-TS=70, PNP-Type=CHI, PNP-Voff=0, PNP-W=0, PNP-X=1, PNP-Y=1
MCU.C.1 MCU.C.3 MCU.C.4 MCU.C.5 MCU.C.6 MCU.C.7 MCU.C.8 MCU.C.22 MCU.C.29: library part "Cap 0.1uF 25V", "0603, X5R or better", Supplier Part Number 1=1276-6840-2-ND, Supplier 1=Digi-Key
MCU.C.2 MCU.C.9 REG.C.12 REG.C.14 REG.C.16 REG.C.18: library part "Cap 1uF 25V", "0805, X5R or better", Supplier Part Number 1=1276-1066-2-ND, Supplier 1=Digi-Key, Supplier 2=Digi-Key, Supplier Part Number 2=1276-1066-1-ND
  REG.C.12 REG.C.14 REG.C.16 REG.C.18: PNP-A=0, PNP-da=0, PNP-dx=0, PNP-dy=0, PNP-FeedType=Tape, PNP-Level=1, PNP-Lv=1, PNP-Nzl=2, PNP-PlacePriority=1, PNP-Pt=0, PNP-TapeIndex=1, PNP-TapeWidth=8, PNP-Thk=1.25, PNP-TS=70, PNP-Type=chi, PNP-Voff=0, PNP-W=0, PNP-X=2.00, PNP-Y=1.25
MCU.J.1: "2-pin 0.100\" header", Supplier Part Number 1=855-M20-9990245, Supplier 1=Mouser, Supplier 2=Digi-Key, Supplier Part Number 2=952-2261-ND
MCU.R.9 MOS.R.5: library part "Res 10k 1% 0805", "Chip resistor", Supplier Part Number 1=RMCF0805FT10K0TR-ND, Supplier 1=Digi-Key
  MOS.R.5: PNP-A=0, PNP-da=0, PNP-dx=0, PNP-dy=0, PNP-FeedType=Tape, PNP-Level=1, PNP-Lv=1, PNP-Nzl=2, PNP-PlacePriority=1, PNP-Pt=0, PNP-TapeIndex=1, PNP-TapeWidth=8, PNP-Thk=0.55, PNP-TS=70, PNP-Type=chi, PNP-Voff=0, PNP-W=0, PNP-X=2.00, PNP-Y=1.25
MCU.U.1: Supplier Part Number 1=W25Q16JVSSIQ-ND, Supplier 1=Digi-Key
MCU.U.5: Supplier Part Number 1=49AJ8740, Supplier 1=Newark
MCU.Y.1: "12MHz Crystal 16pF 100 Ohms 4-SMD, No Lead (3.2mm x 2.5mm)", Supplier Part Number 1=XC2686CT-ND, Supplier 1=Digi-Key, Supplier 2=Mouser, Supplier Part Number 2=520-160-12-30B-AGMT
MOS.C.10 REG.C.13 REG.C.17 USB.C.19: library part "Cap 10uF 25V", "0805, X5R or better", Supplier Part Number 1=81-GRM21BR61E106KA3L, PNP-A=0, PNP-da=0, PNP-dx=0, PNP-dy=0, PNP-FeedType=Tape, PNP-Level=1, PNP-Lv=1, PNP-Nzl=2, PNP-PlacePriority=1, PNP-Pt=0, PNP-TapeIndex=1, PNP-TapeWidth=8, PNP-Thk=1.25, PNP-TS=70, PNP-Type=chi, PNP-Voff=0, PNP-W=0, PNP-X=2.00, PNP-Y=1.25, Supplier 1=Mouser, Supplier 2=Digi-Key, Supplier Part Number 2=490-5523-1-ND
MOS.R.3 MOS.R.4 USB.R.6 USB.R.7: library part "Res 22R 1% 0805", "Chip resistor", Supplier Part Number 1=RMCF0805FT22R0CT-ND, PNP-A=0, PNP-da=0, PNP-dx=0, PNP-dy=0, PNP-FeedType=Tape, PNP-Level=1, PNP-Lv=1, PNP-Nzl=2, PNP-PlacePriority=1, PNP-Pt=0, PNP-TapeIndex=1, PNP-TapeWidth=8, PNP-Thk=0.55, PNP-TS=70, PNP-Type=chi, PNP-Voff=0, PNP-W=0, PNP-X=2.00, PNP-Y=1.25, Supplier 1=Digi-Key, Supplier 2=Arrow, Supplier Part Number 2=RMCF0805FT22R0
MOS.U.2: "Optical Gaming Navigation Sensor", PNP-A=0, PNP-da=0, PNP-dx=0, PNP-dy=0, PNP-FeedType=Tape, PNP-Level=1.3, PNP-Lv=26, PNP-Nzl=4, PNP-PlacePriority=3, PNP-Pt=0, PNP-TapeIndex=2, PNP-TapeWidth=12, PNP-Thk=1.45, PNP-TS=70, PNP-Type=QFP, PNP-Voff=0, PNP-W=0.1, PNP-X=4.9, PNP-Y=3.9
REG.U.3: "3.3V 150mA LDO regulator", Supplier Part Number 1=621-AP2202K-3.3TRG1, PNP-A=90, PNP-da=0, PNP-dx=0, PNP-dy=0, PNP-FeedType=Tape, PNP-Level=1, PNP-Lv=26, PNP-Nzl=2, PNP-PlacePriority=3, PNP-Pt=0, PNP-TapeIndex=1, PNP-TapeWidth=8, PNP-Thk=1, PNP-TS=90, PNP-Type=CHP, PNP-Voff=0, PNP-W=0, PNP-X=2.9, PNP-Y=1.3, Supplier 1=Mouser, Supplier 2=Digi-Key, Supplier 3=Arrow, Supplier Part Number 2=AP2202K-3.3TRG1DICT-ND, Supplier Part Number 3=PWagzdsTFFHKE_U17B45SP-NtndBrheJIaI5hB7gHD0ZVywxIBNyoAQstvnyfZZ0
REG.U.4: "Linear Voltage Regulator IC 1 Output 150mA SOT-23-5", Supplier Part Number 1=AP2204K-1.8TRG1DICT-ND, PNP-A=90, PNP-da=0, PNP-dx=0, PNP-dy=0, PNP-FeedType=Tape, PNP-Level=1, PNP-Lv=26, PNP-Nzl=2, PNP-PlacePriority=3, PNP-Pt=0, PNP-TapeIndex=1, PNP-TapeWidth=8, PNP-Thk=1, PNP-TS=90, PNP-Type=CHP, PNP-Voff=0, PNP-W=0, PNP-X=2.9, PNP-Y=1.3, Supplier 1=Digi-Key, Supplier 2=Mouser, Supplier Part Number 2=621-AP2204K-1.8TRG1
SCW.D.11 SCW.D.12: library part IR12-21C/TR8, "Infrared (IR) Emitter 880nm 1.3V 50mA 1mW/sr @ 20mA 30° 2-SMD, No Lead", Supplier Part Number 1=1080-1351-1-ND, Supplier 1=Digi-Key, Supplier 2=Mouser, Supplier 3=Digi-Key, Supplier 4=Mouser, Supplier 5=Arrow, Supplier Part Number 2=638-IR12-21C, Supplier Part Number 3=VSMB10940CT-ND, Supplier Part Number 4=78-VSMB10940, Supplier Part Number 5=VSMB10940
SCW.Qt.1 SCW.Qt.2: library part PT26-51B/TR8, "Phototransistor 940nm Side View 1206 (3216 Metric)", Supplier Part Number 1=1080-1387-1-ND, Supplier 1=Digi-Key, Supplier 2=Digi-Key, Supplier Part Number 2=1080-1377-1-ND
SCW.R.1 SCW.R.3: library part "Res 100R 1% 0805", "Chip resistor", Supplier Part Number 1=RMCF0805FT100RCT-ND, PNP-A=0, PNP-da=0, PNP-dx=0, PNP-dy=0, PNP-FeedType=Tape, PNP-Level=1, PNP-Lv=1, PNP-Nzl=2, PNP-PlacePriority=1, PNP-Pt=0, PNP-TapeIndex=1, PNP-TapeWidth=8, PNP-Thk=0.55, PNP-TS=70, PNP-Type=chi, PNP-Voff=0, PNP-W=0, PNP-X=2.00, PNP-Y=1.25, Supplier 1=Digi-Key, Supplier 2=Digi-Key, Supplier Part Number 2=RMCF0805FT100RTR-ND
USB.FB.1 USB.FB.2 USB.FB.3: "FERRITE BEAD 600 OHM 0805 1LN", Supplier Part Number 1=535-12556-1-ND, PNP-A=0, PNP-da=0, PNP-dx=0, PNP-dy=0, PNP-FeedType=Tape, PNP-Level=1, PNP-Lv=1, PNP-Nzl=2, PNP-PlacePriority=1, PNP-Pt=0, PNP-TapeIndex=1, PNP-TapeWidth=8, PNP-Thk=0.55, PNP-TS=70, PNP-Type=chi, PNP-Voff=0, PNP-W=0, PNP-X=2.00, PNP-Y=1.25, Supplier 1=Digi-Key
USB.J.3: "USB-C (USB TYPE-C) USB 2.0 Receptacle Connector 24 (16+8 Dummy) Position Surface Mount, Right Angle; Through Hole", Supplier Part Number 1=670-DX07S016JA1R1500CT-ND, Supplier 1=Digi-Key, Supplier 2=Mouser, Supplier Part Number 2=656-DX07S016JA1R1500
USB.Ra.1: library part "Quad Res 10k 1% 1206", "Chip resistor"
USB.Z.1: "TVS DIODE 5.5V 6TSOP (Low capacitance, USB)", PNP-A=270, PNP-da=0, PNP-dx=0, PNP-dy=0, PNP-FeedType=Tape, PNP-Level=1, PNP-Lv=26, PNP-Nzl=2, PNP-PlacePriority=3, PNP-Pt=0, PNP-TapeIndex=1, PNP-TapeWidth=8, PNP-Thk=1, PNP-TS=90, PNP-Type=CHP, PNP-Voff=0, PNP-W=0, PNP-X=2.9, PNP-Y=1.3

## Free pads (board coordinates)
  round 0 hole 3.5: ""(9.132,3.562) ""(50.004,-28.058)

## Via types
v1: diameter 0.6, hole 0.3, Top Layer to Bottom Layer, tented both sides, 258 vias
v2: diameter 0.7, hole 0.3, Top Layer to Bottom Layer, tented both sides, 29 vias
v3: diameter 1.016, hole 0.508, Top Layer to Bottom Layer, tented both sides, 28 vias
v4: diameter 1, hole 0.5, Top Layer to Bottom Layer, tented both sides, 9 vias
v5: diameter 0.8, hole 0.4, Top Layer to Bottom Layer, tented both sides, 2 vias

## Nets (pads, with @x,y where several pads share a name; then routed paths per layer and width w, separated by ;. In a path a pad name is that pad's centre, name@x,y a point inside that pad or via, vN(x,y) a via of type N, cw(c..) or ccw(c..) an arc to the next point about the centre after c; other vN are vias at no path point)
1V1: MCU.C.9.2 MCU.C.22.2 MCU.C.29.2 MCU.U.5.23 MCU.U.5.45 MCU.U.5.50 | length 29.8
  Top Layer w0.2: MCU.C.22.2@-7.6,-7.85 ccw(c-6.996,-7.246) -6.996,-8.1 -6.9,-8.1 cw(c-6.9,-9.307) -6.047,-8.453 -5.5,-9 cw(c-5.983,-9.483) -5.3,-9.483 MCU.U.5.23@-5.3,-10.75 ; MCU.U.5.45@-6.5,-17.6 -6.5,-18.217 cw(c-7.183,-18.217) -6.7,-18.7 -7.154,-19.154 ccw(c-6.561,-19.748) MCU.C.9.2@-7.4,-19.748 ccw(c-6.791,-19.748) -7.222,-20.178 -6.4,-21 ccw(c-5.917,-20.517) -5.917,-21.2 -5.5,-21.2 ccw(c-5.5,-20.355) -4.903,-20.953 MCU.C.29.2@-4.3,-20.35 cw(c-3.817,-19.867) -4.5,-19.867 MCU.U.5.50@-4.5,-17.6
  Bottom Layer w0.4: v2(-7.1,-20.5) cw(c-7.1,-19.776) -7.612,-20.288 -10.256,-17.644 cw(c-8.46,-15.848) -11,-15.848 -11,-12.852 cw(c-7.977,-12.852) -10.115,-10.715 -8.096,-8.696 cw(c-7.623,-9.168) -7.623,-8.5 v2(-6.5,-8.5)
1V8: MOS.R.3.2 MOS.U.2.4 REG.C.17.2 REG.C.18.2 REG.U.4.5 | length 45.9
  Top Layer w1: REG.U.4.5@13.247,-10.287 15.473,-10.287 ccw(c15.473,-7.908) REG.C.17.2@17.155,-9.59 cw(c18.278,-10.714) 18.278,-9.125 21,-9.125 cw(c21,-9.91) 21.555,-9.355 22.777,-10.577 cw(c21.864,-11.49) MOS.U.2.4@23.155,-11.49 ; v4(24.5,-25.4) cw(c25.94,-26.84) 25.94,-24.804 MOS.R.3.2@26.022,-24.804
  Bottom Layer w1: MOS.U.2.4@23.155,-11.49 cw(c24.795,-11.49) 23.634,-10.332 cw(c26.849,-13.544) 26.849,-9 29.346,-9 29.349,-9 cw(c29.349,-13.297) 32.384,-10.255 cw(c27.045,-15.601) 34.6,-15.601 34.6,-15.604 34.6,-17.534 cw(c27.99,-17.534) 32.666,-22.205 32.665,-22.207 cw(c28.8,-18.316) 28.8,-23.8 28.797,-23.8 28.363,-23.8 ccw(c28.363,-29.263) v4(24.5,-25.4)
3V3: MCU.C.1.2 MCU.C.2.2 MCU.C.3.2 MCU.C.4.2 MCU.C.5.2 MCU.C.6.2 MCU.C.7.2 MCU.C.8.2 MCU.R.9.1 MCU.U.1.8 MCU.U.5.1 MCU.U.5.10 MCU.U.5.22 MCU.U.5.26 MCU.U.5.33 MCU.U.5.42 MCU.U.5.43 MCU.U.5.44 MCU.U.5.48 MCU.U.5.49 MOS.R.5.2 MOS.U.2.5 REG.C.13.2 REG.C.14.2 REG.U.3.5 SCW.Qt.1.C SCW.Qt.2.C SCW.R.1.2 SCW.R.3.2 | length 180.7
  Top Layer w0.2: MCU.C.2.2@-10.548,-18.1 MCU.C.2.2@-10.502,-18.1 ; v1(-9.9,-13.2) cw(c-9.84,-13.26) -9.84,-13.175 MCU.U.5.33@-8.125,-13.175 ; MCU.C.8.2@-9.1,-18.45 ccw(c-8.979,-18.329) -8.979,-18.5 -7.483,-18.5 ccw(c-7.483,-17.817) -7,-18.3 ccw(c-7.241,-18.059) -6.9,-18.059 MCU.U.5.44@-6.9,-17.6 ; MCU.C.8.2@-9.1,-18.307 cw(c-7.755,-18.307) MCU.C.8.2@-9.084,-18.1 ; MCU.U.5.42@-8.125,-16.775 -8.706,-17.356 ; MCU.U.5.43@-7.3,-17.6 cw(c-8.507,-16.393) -8.507,-18.1 MCU.C.8.2@-9.084,-18.1 ; MCU.U.5.26@-6.5,-10.75 -6.5,-10.324 cw(c-5.476,-10.324) -6.2,-9.6 -6.154,-9.554 cw(c-5.983,-9.724) v1(-5.983,-9.483) ; MCU.C.5.2@-6.1,-7.45 -5.904,-7.45 cw(c-5.904,-8.304) -5.3,-7.7 cw(c-6.266,-8.666) -4.9,-8.666 MCU.U.5.22@-4.9,-10.75 ; MCU.U.5.1@-1.275,-16.775 ccw(c-0.008,-15.508) -0.008,-17.3 MCU.C.3.2@0.15,-17.3 ; MCU.U.5.10@-1.275,-13.175 1.569,-13.175 ccw(c1.569,-12.919) MCU.C.4.2@1.75,-13.1 ; MCU.C.2.2@-10.502,-18.1 ccw(c-10.502,-15.56) -9.2,-17.741 ccw(c-10.502,-15.56) -8.706,-17.356 ; MCU.C.2.2@-10.502,-18.1 -9.2,-18.1 MCU.C.8.2@-9.084,-18.1 ; MCU.C.8.2@-9.084,-18.1 cw(c-7.755,-18.307) -8.706,-17.356 ; -5.305,-19.505 ccw(c-6.666,-19.384) -5.3,-19.384 MCU.U.5.48@-5.3,-17.6 -5.3,-16.883 cw(c-4.617,-16.883) v1(-5.1,-16.4) cw(c-5.583,-16.883) -4.9,-16.883 MCU.U.5.49@-4.9,-17.6 -4.9,-18.676 cw(c-5.924,-18.676) -5.2,-19.4 -5.305,-19.505 ; -5.305,-19.505 cw(c-6.666,-19.384) MCU.C.7.2@-5.7,-20.35 cw(c-4.614,-20.35) -5.382,-19.582 -5.305,-19.505
  Top Layer w0.6: MCU.C.6.2@-10.75,-13.2 v1(-9.9,-13.2) ; MCU.C.2.2@-10.548,-18.1 -10.269,-17.985 ccw(c-9.146,-16.861) -9.145,-18.45 MCU.C.8.2@-9.1,-18.45 cw(c-8.859,-18.209) -9.2,-18.209 -9.2,-18.1 -9.2,-17.741 v2(-9.2,-17.4) ; v2(0.7,-13.2) 1.509,-13.2 ccw(c1.509,-12.859) MCU.C.4.2@1.75,-13.1 ; SCW.R.1.2@58.91,-25.055 59.74,-25.885 ccw(c60.5,-25.125) 60.5,-26.2 61.476,-26.2 ccw(c61.476,-25.176) 62.2,-25.9 cw(c64.373,-28.073) 64.373,-25 68.259,-25 68.649,-25.39 SCW.R.3.2@68.955,-25.39
  Top Layer w0.65: MCU.C.1.2@-3.15,-29.6 MCU.U.1.8@-3.15,-27.805 v2(-1.345,-27.805)
  Top Layer w0.8: v2(-1.345,-27.805) -0.894,-28.256 ccw(c0.902,-26.46) 0.902,-29 2.4,-29 cw(c2.4,-30.69) 3.595,-29.495 4.556,-30.456 ccw(c6.352,-28.66) 6.352,-31.2 27.465,-31.2 27.468,-31.2 ccw(c27.468,-27.259) 30.256,-30.044 30.382,-29.918 cw(c37.666,-37.199) 37.666,-26.9 42.083,-26.9 42.085,-26.9 ccw(c42.085,-23.484) 44.502,-25.898 44.601,-25.799 cw(c47.254,-28.452) 47.254,-24.7 58.721,-24.7 58.91,-24.888 SCW.R.1.2@58.91,-25.055 ; MCU.R.9.1@7.3,-25.798 MOS.R.5.2@7.3,-23.402 ; v4(38.2,-2.5) 52.534,-2.5 ccw(c52.534,-1.744) SCW.Qt.1.C@53.069,-2.278 ; SCW.Qt.1.C@52.567,-2.278 ccw(c51.5,-0.669) 52.866,-2.034 54.259,-0.641 cw(c54.6,-0.983) 54.6,-0.5 57.5,0 cw(c57.5,-0.966) 58.183,-0.283 58.917,-1.017 ccw(c59.6,-0.334) 59.6,-1.3 60.503,-1.3 ccw(c60.503,-0.287) SCW.Qt.2.C@61.219,-1.003
  Plane 2 w1.2: 4.2,-13.1 9.048,-13.1 ccw(c9.048,-10.56) 10.844,-12.356 13.156,-10.044 cw(c14.952,-11.84) 14.952,-9.3 18.648,-9.3 cw(c18.648,-11.84) 20.444,-10.044 20.857,-10.457 cw(c19.549,-11.765) MOS.U.2.5@21.399,-11.765
  Bottom Layer w1: MOS.U.2.5@21.399,-11.765 21.399,-11.093 cw(c24.188,-11.093) 22.214,-9.122 cw(c26.37,-13.276) 26.37,-7.4 ccw(c26.37,9.33) v4(38.2,-2.5)
  other v1: -9.7,-26.6 -13.5,-26.1 -11.5,-26.1
  other v2: 7.3,-24.6 -0.8,-17.4 -5.2,-8.2